# EAGLE board KeyFob (EAGLE 5.11)
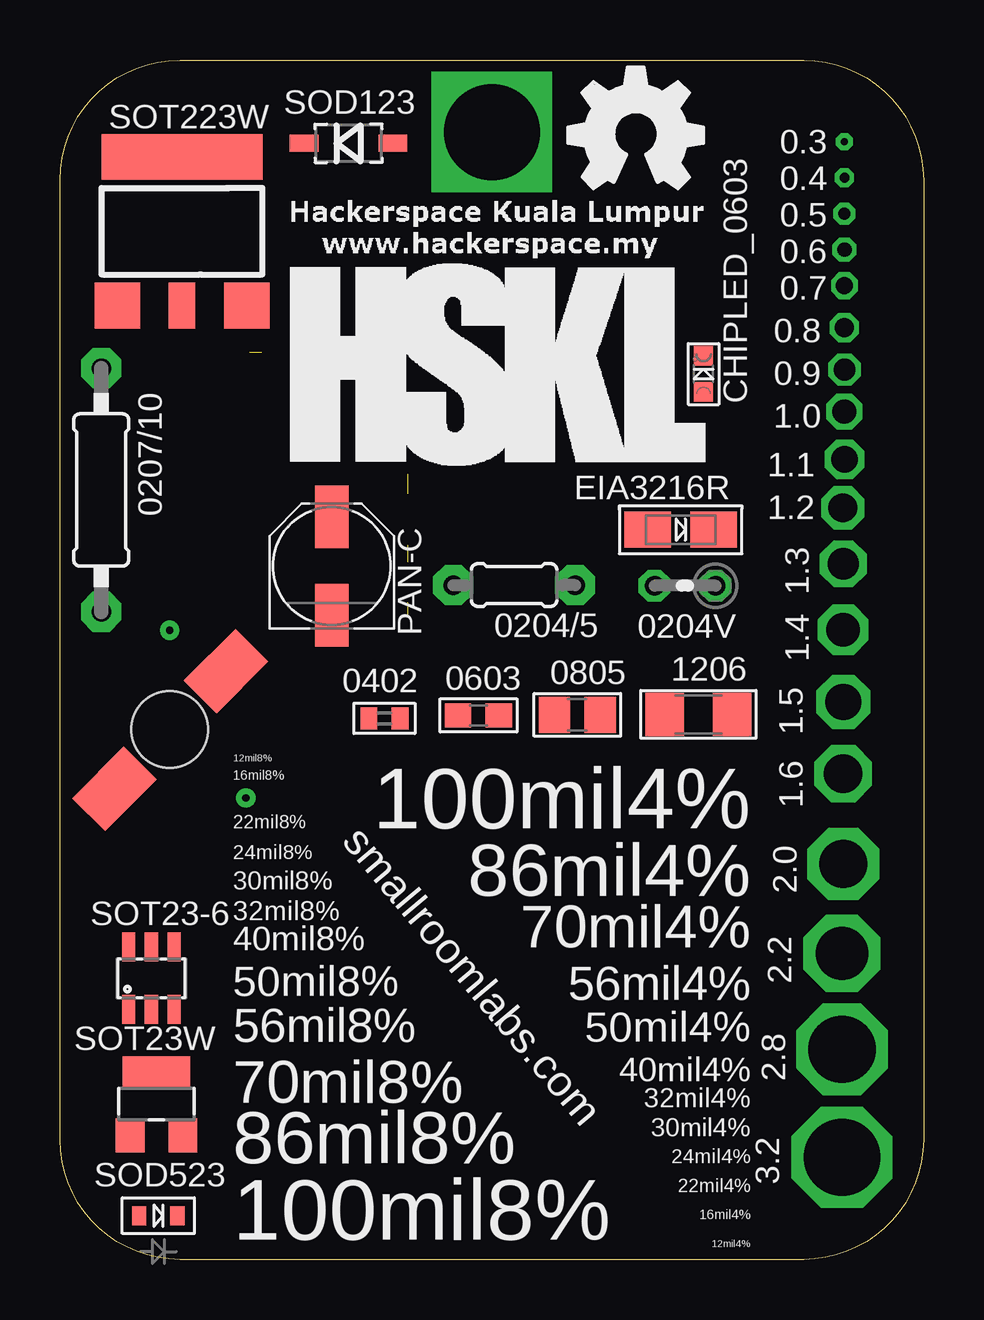
[diagram p0: board, top side]
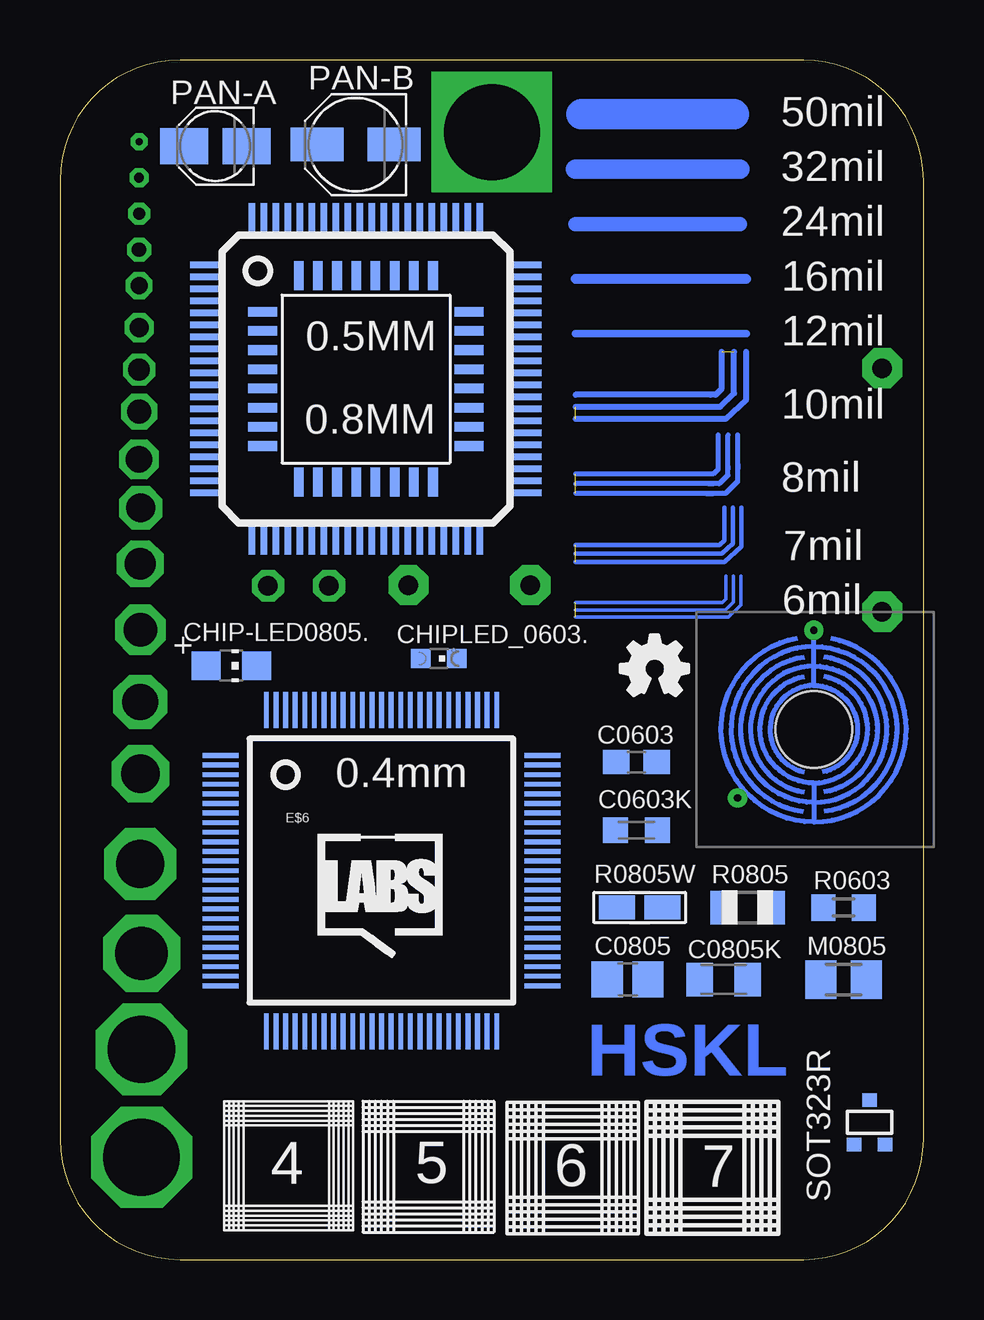
[diagram p1: board, bottom side, seen from below]

Size 36 x 50 mm. Coordinates in mm from the lower left corner, seen from the top.
Outline: 0,14 0,45 arc-90 5,50 18,50 31,50 arc-90 36,45 36,14 36,5 arc-90 31,0 18,0 5,0 arc-90 0,5 0,14
Copper layers (1*16): Top 0.035mm / dielectric 1.5mm / Bottom 0.035mm
Design rules "default": minimum track width 10mil, minimum drill 24mil, track to track 8mil, track to pad 8mil, pad to pad 8mil, via to via 8mil, smd to smd 8mil, copper to edge 40mil, drill to drill 8mil, minimum pad ring 10mil, minimum via ring 8mil, stop-mask expansion 4mil, vias tented up to drill 0mil, thermal gap 10mil

## Footprints (pad centres in the part's own frame; a part is rotated, then mirrored left to right if it is on the bottom)
LQFP80 = smd 1.2 x 0.254: 1 -6.725,4.75; 2 -6.725,4.25; 3 -6.725,3.75; 4 -6.725,3.25; 5 -6.725,2.75; 6 -6.725,2.25; 7 -6.725,1.75; 8 -6.725,1.25; 9 -6.725,0.75; 10 -6.725,0.25; 11 -6.725,-0.25; 12 -6.725,-0.75; 13 -6.725,-1.25; 14 -6.725,-1.75; 15 -6.725,-2.25; 16 -6.725,-2.75; 17 -6.725,-3.25; 18 -6.725,-3.75; 19 -6.725,-4.25; 20 -6.725,-4.75; 41 6.725,-4.75; 42 6.725,-4.25; 43 6.725,-3.75; 44 6.725,-3.25; 45 6.725,-2.75; 46 6.725,-2.25; 47 6.725,-1.75; 48 6.725,-1.25; 49 6.725,-0.75; 50 6.725,-0.25; 51 6.725,0.25; 52 6.725,0.75; 53 6.725,1.25; 54 6.725,1.75; 55 6.725,2.25; 56 6.725,2.75; 57 6.725,3.25; 58 6.725,3.75; 59 6.725,4.25; 60 6.725,4.75 | smd 0.254 x 1.2: 21 -4.75,-6.725; 22 -4.25,-6.725; 23 -3.75,-6.725; 24 -3.25,-6.725; 25 -2.75,-6.725; 26 -2.25,-6.725; 27 -1.75,-6.725; 28 -1.25,-6.725; 29 -0.75,-6.725; 30 -0.25,-6.725; 31 0.25,-6.725; 32 0.75,-6.725; 33 1.25,-6.725; 34 1.75,-6.725; 35 2.25,-6.725; 36 2.75,-6.725; 37 3.25,-6.725; 38 3.75,-6.725; 39 4.25,-6.725; 40 4.75,-6.725; 61 4.75,6.725; 62 4.25,6.725; 63 3.75,6.725; 64 3.25,6.725; 65 2.75,6.725; 66 2.25,6.725; 67 1.75,6.725; 68 1.25,6.725; 69 0.75,6.725; 70 0.25,6.725; 71 -0.25,6.725; 72 -0.75,6.725; 73 -1.25,6.725; 74 -1.75,6.725; 75 -2.25,6.725; 76 -2.75,6.725; 77 -3.25,6.725; 78 -3.75,6.725; 79 -4.25,6.725; 80 -4.75,6.725
LQFP32 = smd 0.4 x 1.2: 1 -2.8,-4.3; 2 -2,-4.3; 3 -1.2,-4.3; 4 -0.4,-4.3; 5 0.4,-4.3; 6 1.2,-4.3; 7 2,-4.3; 8 2.8,-4.3; 17 2.8,4.3; 18 2,4.3; 19 1.2,4.3; 20 0.4,4.3; 21 -0.4,4.3; 22 -1.2,4.3; 23 -2,4.3; 24 -2.8,4.3 | smd 1.2 x 0.4: 9 4.3,-2.8; 10 4.3,-2; 11 4.3,-1.2; 12 4.3,-0.4; 13 4.3,0.4; 14 4.3,1.2; 15 4.3,2; 16 4.3,2.8; 25 -4.3,2.8; 26 -4.3,2; 27 -4.3,1.2; 28 -4.3,0.4; 29 -4.3,-0.4; 30 -4.3,-1.2; 31 -4.3,-2; 32 -4.3,-2.8
0204/5 = drill 0.813 pad 1.676 octagon: 1 -2.54,0; 2 2.54,0
0204V = drill 0.813 octagon: 1 -1.27,0; 2 1.27,0
0207/10 = drill 0.813 pad 1.676 octagon: 1 -5.08,0; 2 5.08,0
0402 = smd 0.7 x 0.9: 1 -0.65,0; 2 0.65,0
0603 = smd 1.1 x 1: 1 -0.85,0; 2 0.85,0
0805 = smd 1.3 x 1.5: 1 -0.95,0; 2 0.95,0
1206 = smd 1.6 x 1.8: 1 -1.4,0; 2 1.4,0
C0603 = smd 1.1 x 1: 1 -0.85,0; 2 0.85,0
C0603K = smd 1.05 x 1.08: 1 -0.875,0; 2 0.875,0
C0805 = smd 1.3 x 1.5: 1 -0.85,0; 2 0.85,0
C0805K = smd 1.1 x 1.4: 1 -1,0; 2 1,0
CHIP-LED0805 = smd 1.2 x 1.2: A 0,-1.05; C 0,1.05
CHIPLED_0603 = smd 0.8 x 0.8: A 0,-0.75; C 0,0.75
TOUCH_LED3 = smd 3.048 x 1.93 rotated 45 bottom: P$1 2.429,2.354; P$2 -2.481,-2.302 | drill 0.3 round: TINNER 4.128,0; TOUTER -2.857,3.175 | hole 3.2: 0,0
TQFP-100-12X12MM = smd 1.5 x 0.2: 1 -6.7,4.8; 2 -6.7,4.4; 3 -6.7,4; 4 -6.7,3.6; 5 -6.7,3.2; 6 -6.7,2.8; 7 -6.7,2.4; 8 -6.7,2; 9 -6.7,1.6; 10 -6.7,1.2; 11 -6.7,0.8; 12 -6.7,0.4; 13 -6.7,0; 14 -6.7,-0.4; 15 -6.7,-0.8; 16 -6.7,-1.2; 17 -6.7,-1.6; 18 -6.7,-2; 19 -6.7,-2.4; 20 -6.7,-2.8; 21 -6.7,-3.2; 22 -6.7,-3.6; 23 -6.7,-4; 24 -6.7,-4.4; 25 -6.7,-4.8; 51 6.7,-4.8; 52 6.7,-4.4; 53 6.7,-4; 54 6.7,-3.6; 55 6.7,-3.2; 56 6.7,-2.8; 57 6.7,-2.4; 58 6.7,-2; 59 6.7,-1.6; 60 6.7,-1.2; 61 6.7,-0.8; 62 6.7,-0.4; 63 6.7,0; 64 6.7,0.4; 65 6.7,0.8; 66 6.7,1.2; 67 6.7,1.6; 68 6.7,2; 69 6.7,2.4; 70 6.7,2.8; 71 6.7,3.2; 72 6.7,3.6; 73 6.7,4; 74 6.7,4.4; 75 6.7,4.8 | smd 0.2 x 1.5: 26 -4.8,-6.7; 27 -4.4,-6.7; 28 -4,-6.7; 29 -3.6,-6.7; 30 -3.2,-6.7; 31 -2.8,-6.7; 32 -2.4,-6.7; 33 -2,-6.7; 34 -1.6,-6.7; 35 -1.2,-6.7; 36 -0.8,-6.7; 37 -0.4,-6.7; 38 0,-6.7; 39 0.4,-6.7; 40 0.8,-6.7; 41 1.2,-6.7; 42 1.6,-6.7; 43 2,-6.7; 44 2.4,-6.7; 45 2.8,-6.7; 46 3.2,-6.7; 47 3.6,-6.7; 48 4,-6.7; 49 4.4,-6.7; 50 4.8,-6.7; 76 4.8,6.7; 77 4.4,6.7; 78 4,6.7; 79 3.6,6.7; 80 3.2,6.7; 81 2.8,6.7; 82 2.4,6.7; 83 2,6.7; 84 1.6,6.7; 85 1.2,6.7; 86 0.8,6.7; 87 0.4,6.7; 88 0,6.7; 89 -0.4,6.7; 90 -0.8,6.7; 91 -1.2,6.7; 92 -1.6,6.7; 93 -2,6.7; 94 -2.4,6.7; 95 -2.8,6.7; 96 -3.2,6.7; 97 -3.6,6.7; 98 -4,6.7; 99 -4.4,6.7; 100 -4.8,6.7
EIA3216-18/A-R = smd 1.95 x 1.5: + 1.375,0; - -1.375,0
M0805 = smd 1.3 x 1.6: 1 -0.95,0; 2 0.95,0
PANASONIC_A = smd 2 x 1.5: + 1.3,0; - -1.3,0
PANASONIC_B = smd 2.2 x 1.4: + 1.6,0; - -1.6,0
PANASONIC_C = smd 2.6 x 1.4: + 2.05,0; - -2.05,0
R0603 = smd 1 x 1.1: 1 -0.85,0; 2 0.85,0
R0805 = smd 1.1 x 1.4: 1 -1,0; 2 1,0
R0805W = smd 1.5 x 1: 1 -0.94,0; 2 0.94,0
SOD-123 = smd 1.2 x 0.7: A 1.85,0; C -1.85,0
SOD-523 = smd 0.8 x 0.6: A 0,-0.8; K 0,0.8
SOT23-6 = smd 0.55 x 1.2: 1 -0.95,-1.3; 2 0,-1.3; 3 0.95,-1.3; 4 0.95,1.3; 5 0,1.3; 6 -0.95,1.3
SOT23-W = smd 1.2 x 1.4: 1 -1.1,-1.3; 2 1.1,-1.3 | smd 2.8 x 1.4: 3 0,1.3
SOT223-W = smd 1.9 x 1.9: 1 -2.7,-3.1; 3 2.7,-3.1 | smd 1.1 x 1.9: 2 0,-3.1 | smd 6.7 x 1.9: 4 0,3.1
SOT323-R = smd 0.6 x 0.55: 1 -0.65,-0.925; 2 0.65,-0.925; 3 0,0.925

## Placement (x,y rotation side)
0.5MM  [LQFP80]  23.25,36.71 0 bottom
0.8MM  [LQFP32]  23.25,36.71 0 bottom
0204/5  [0204/5]  18.93,28.11 180 top
0204V  [0204V]  26.05,28.08 180 top
0207/10  [0207/10]  1.72,32.08 270 top
0402  [0402]  13.53,22.55 180 top
0603  [0603]  17.44,22.68 180 top
0805  [0805]  21.57,22.7 180 top
1206  [1206]  26.62,22.72 180 top
C0603  [C0603]  11.97,20.73 0 bottom
C0603K  [C0603K]  11.97,17.9 0 bottom
C0805  [C0805]  12.33,11.67 0 bottom
C0805K  [C0805K]  8.33,11.67 0 bottom
CHIP-LED0805.  [CHIP-LED0805]  28.85,24.75 270 bottom
CHIPLED_0603  [CHIPLED_0603]  26.83,36.91 0 top
CHIPLED_0603.  [CHIPLED_0603]  20.21,25.05 270 bottom
E$1  [TOUCH_LED3]  4.57,22.1 90 bottom
E$4  [SRL-LOGO-TPLACE-5MM]  25.24,12.56 0 bottom
E$6  [TQFP-100-12X12MM]  22.59,16.21 0 bottom
E$10  [OSHW_FILLX200_NOTEXT]  21.17,44.63 0 top
E$11  [OSHW_FILLX100_NOTEXT]  12.63,23.5 0 bottom
EIA3216R  [EIA3216-18/A-R]  25.88,30.42 0 top
M0805  [M0805]  3.33,11.67 0 bottom
PAN-A  [PANASONIC_A]  29.52,46.41 180 bottom
PAN-B  [PANASONIC_B]  23.68,46.47 180 bottom
PAN-C  [PANASONIC_C]  11.33,28.91 90 top
R0603  [R0603]  3.33,14.67 0 bottom
R0805  [R0805]  7.33,14.67 0 bottom
R0805W  [R0805W]  11.83,14.67 0 bottom
SOD123  [SOD-123]  12.03,46.53 0 top
SOD523  [SOD-523]  4.1,1.83 270 top
SOT23-6  [SOT23-6]  3.81,11.73 0 top
SOT23W  [SOT23-W]  4.02,6.48 0 top
SOT223W  [SOT223-W]  5.09,42.86 0 top
SOT323R  [SOT323-R]  2.25,5.72 0 bottom

## Library data of the parts
0.5MM 0402 0603 0805 1206 CHIPLED_0603 EIA3216R SOD123 SOD523 SOT23-6 SOT23W SOT223W SOT323R = microbuilder
0.8MM E$6 = SparkFun
0204/5 0204V 0207/10 C0603 C0603K C0805 C0805K CHIP-LED0805. CHIPLED_0603. M0805 PAN-A PAN-B PAN-C R0603 R0805 R0805W = adafruit
E$1 E$4 = SmallRoomLabs
E$10 E$11 = OSHW

## Tracks (layer width: path | path; a pad name or v marks a point on that pad's centre or on a via)
S$28  (via drill 4)
  other vias: 18,47
S$29  (via drill 3.2)
  other vias: 32.6,4.26
S$30  (via drill 2.8)
  other vias: 32.6,8.76
S$31  (via drill 2.2)
  other vias: 32.6,12.76
S$32  (via drill 2)
  other vias: 32.65,16.49
S$33  (via drill 1.6)
  other vias: 32.65,20.25
S$34  (via drill 1.5)
  other vias: 32.65,23.25
S$35  (via drill 1.4)
  other vias: 32.65,26.25
S$36  (via drill 1.3)
  other vias: 32.65,29
S$37  (via drill 1.2)
  other vias: 32.64,31.33
S$38  (via drill 1.1)
  other vias: 32.7,33.35
S$39  (via drill 1)
  other vias: 32.7,35.35
S$40  (via drill 0.9)
  other vias: 32.7,37.09
S$41  (via drill 0.8)
  other vias: 32.7,38.84
S$42  (via drill 0.7)
  other vias: 32.7,40.59
S$43  (via drill 0.6)
  other vias: 32.7,42.09
S$44  (via drill 0.5)
  other vias: 32.7,43.59
S$45  (via drill 0.4)
  other vias: 32.7,45.09
S$46  (via drill 0.3)
  other vias: 32.7,46.59
S$47  (2 unrouted)
  Bottom 0.152: 14.51,27.08 8.26,27.08 7.93,27.41 7.93,28.48 | 14.51,27.39 8.38,27.39 8.23,27.54 8.23,28.48 | 14.51,26.78 8.13,26.78 7.62,27.29 7.62,28.48
S$48  (2 unrouted)
  Bottom 0.178: 8.51,29.06 14.51,29.06 | 8.31,29.06 8.51,29.06 | 14.51,29.42 8.41,29.42 7.95,29.85 7.95,31.35 | 14.51,29.77 8.79,29.77 8.51,29.77 8.31,29.98 8.31,31.35 | 7.6,31.35 7.6,29.72 8.31,29.06 | 8.31,29.06 8.51,29.06
S$49  (2 unrouted)
  Bottom 0.203: 9.07,31.93 14.51,31.93 | 9.07,31.93 8.77,31.93 | 8.97,32.34 14.51,32.34 | 8.97,32.34 8.77,32.34 | 14.51,32.75 8.77,32.75 8.56,32.95 8.56,34.37 | 8.15,33.05 8.15,34.37 | 8.15,33.05 8.15,32.95 | 7.75,33.15 7.75,34.37 | 7.75,33.15 7.75,32.95 | 8.97,32.34 8.51,32.34 8.15,32.7 8.15,33.05 | 9.07,31.93 8.26,31.93 7.75,32.44 7.75,33.15
S$50  (2 unrouted)
  Bottom 0.254: 8.87,35.03 14.51,35.03 | 8.26,35.03 8.87,35.03 | 8.94,35.54 14.51,35.54 | 8.48,35.54 8.94,35.54 | 8.87,36.05 14.51,36.05 | 8.66,36.05 8.87,36.05 | 8.41,37.83 8.41,36.3 8.66,36.05 | 7.9,37.83 7.9,36.1 8.48,35.54 | 7.39,37.83 7.39,35.85 8.26,35.03 | 8.66,36.05 8.87,36.05 | 8.48,35.54 8.94,35.54 | 8.26,35.03 8.87,35.03
S$51
  Bottom 0.305: 7.39,38.59 14.51,38.59
S$52
  Bottom 0.406: 7.39,40.88 14.51,40.88
S$53
  Bottom 0.61: 7.65,43.16 14.51,43.16
S$54
  Bottom 0.813: 7.65,45.45 14.51,45.45
S$55
  Bottom 1.27: 7.9,47.73 14.25,47.73

## Text on the board
Bottom: HSKL
tPlace: 0.3 | 0.4 | 0.5 | 0.6 | 0.7 | 0.8 | 0.9 | 1.0 | 1.1 | 1.2 | 1.3 | 1.4 | 1.5 | 12mil8% | 16mil8% | 100mil4% | 1.6 | 22mil8% | 24mil8% | smallroomlabs.com | 86mil4% | 30mil8% | 70mil4% | 2.0 | 32mil8% | 40mil8% | 56mil4% | 2.2 | 50mil8% | 50mil4% | 56mil8% | 40mil4% | 70mil8% | 32mil4% | 2.8 | 30mil4% | 24mil4% | 86mil8% | 22mil4% | 3.2 | 16mil4% | 100mil8% | 12mil4%
bPlace: 50mil | 32mil | 24mil | 16mil | 12mil | 10mil | 8mil | 7mil | 6mil | 0.4mm | 7 | 6 | 5 | 4